# Allegro board 2019-09-0333.brd
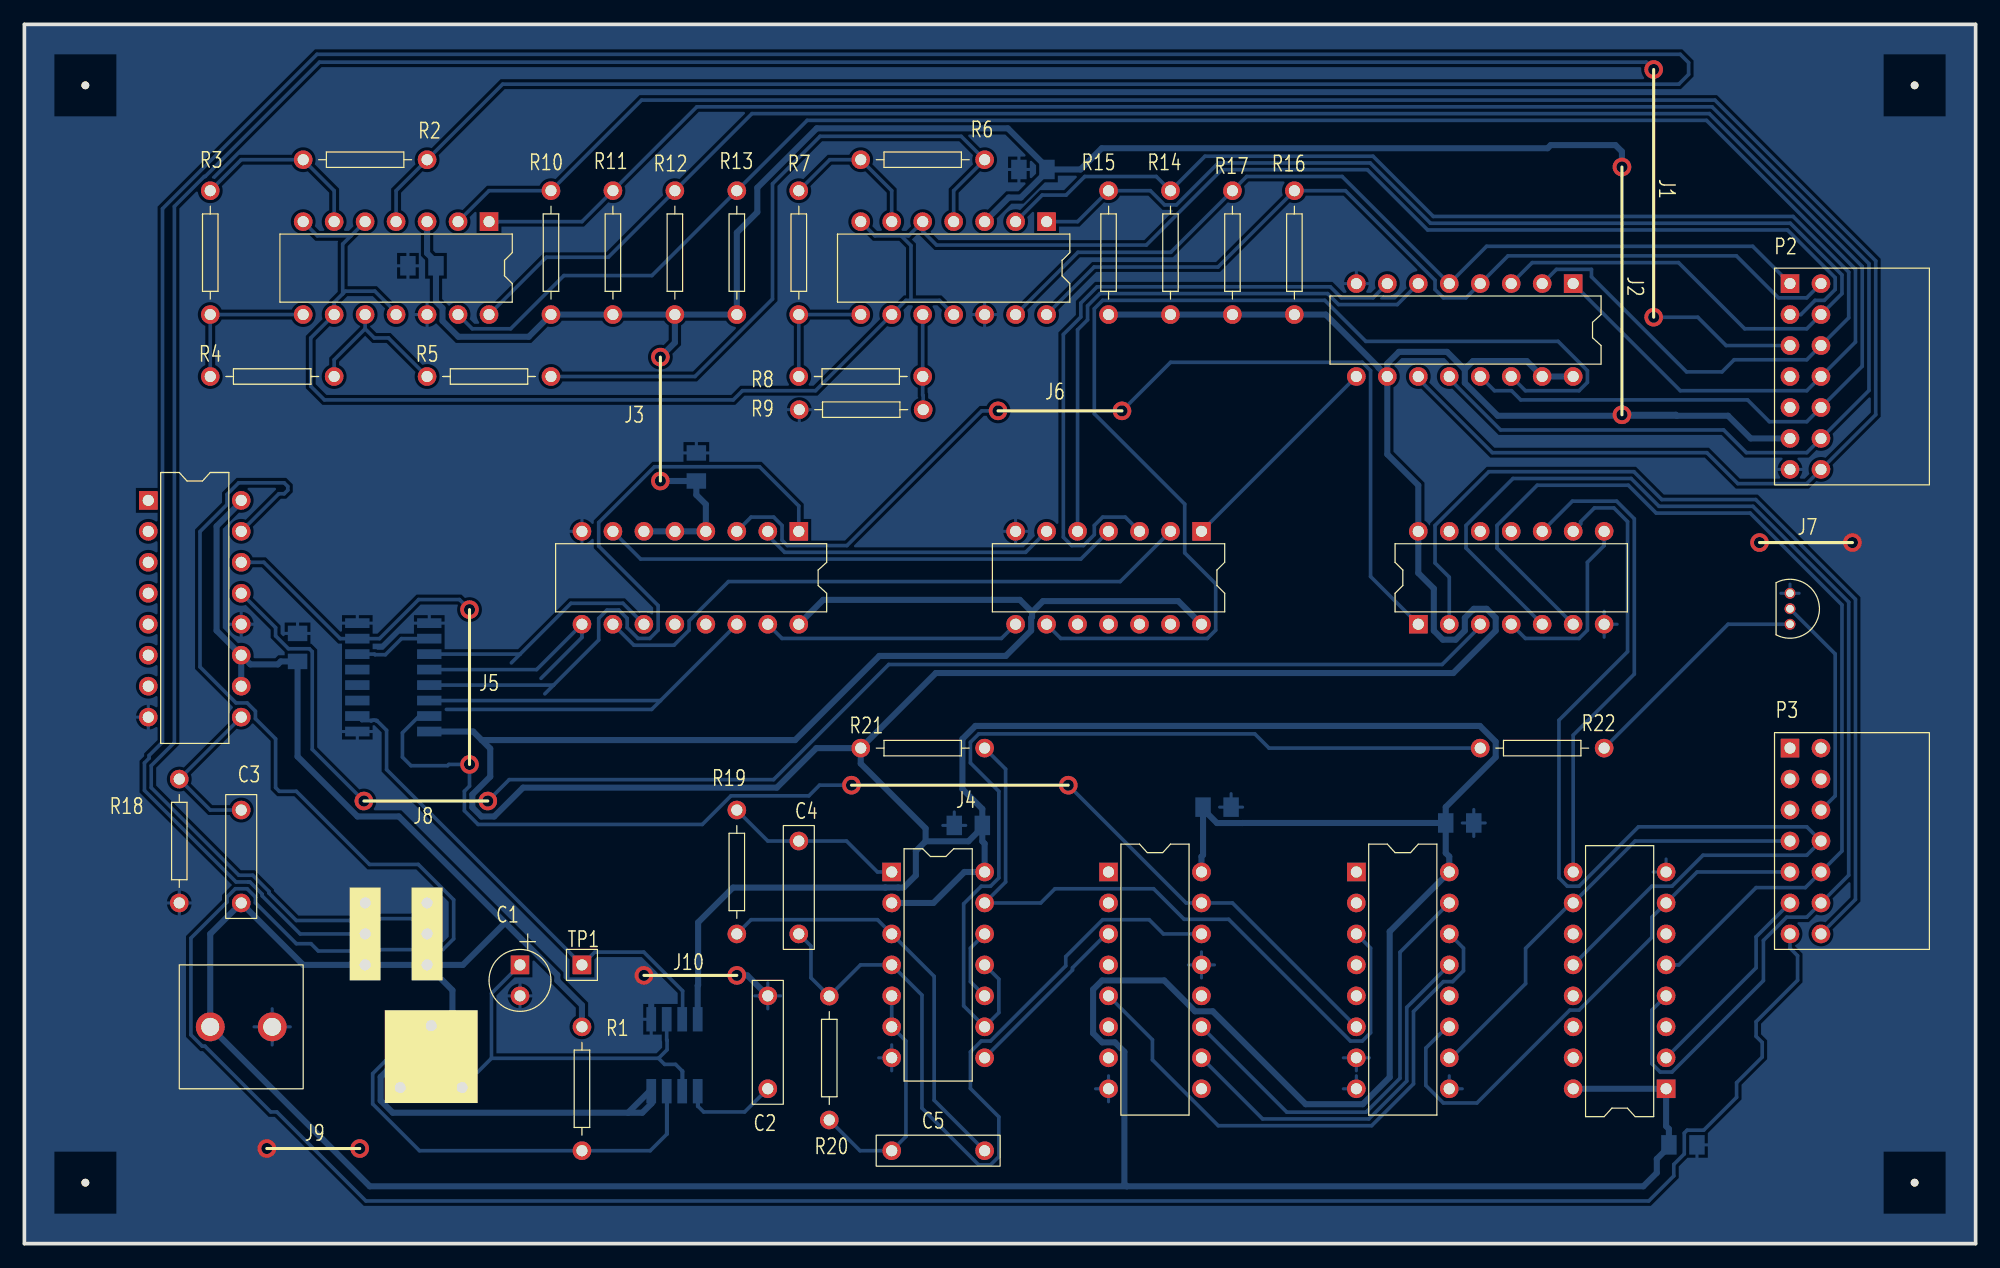
[diagram p0: board, top side]
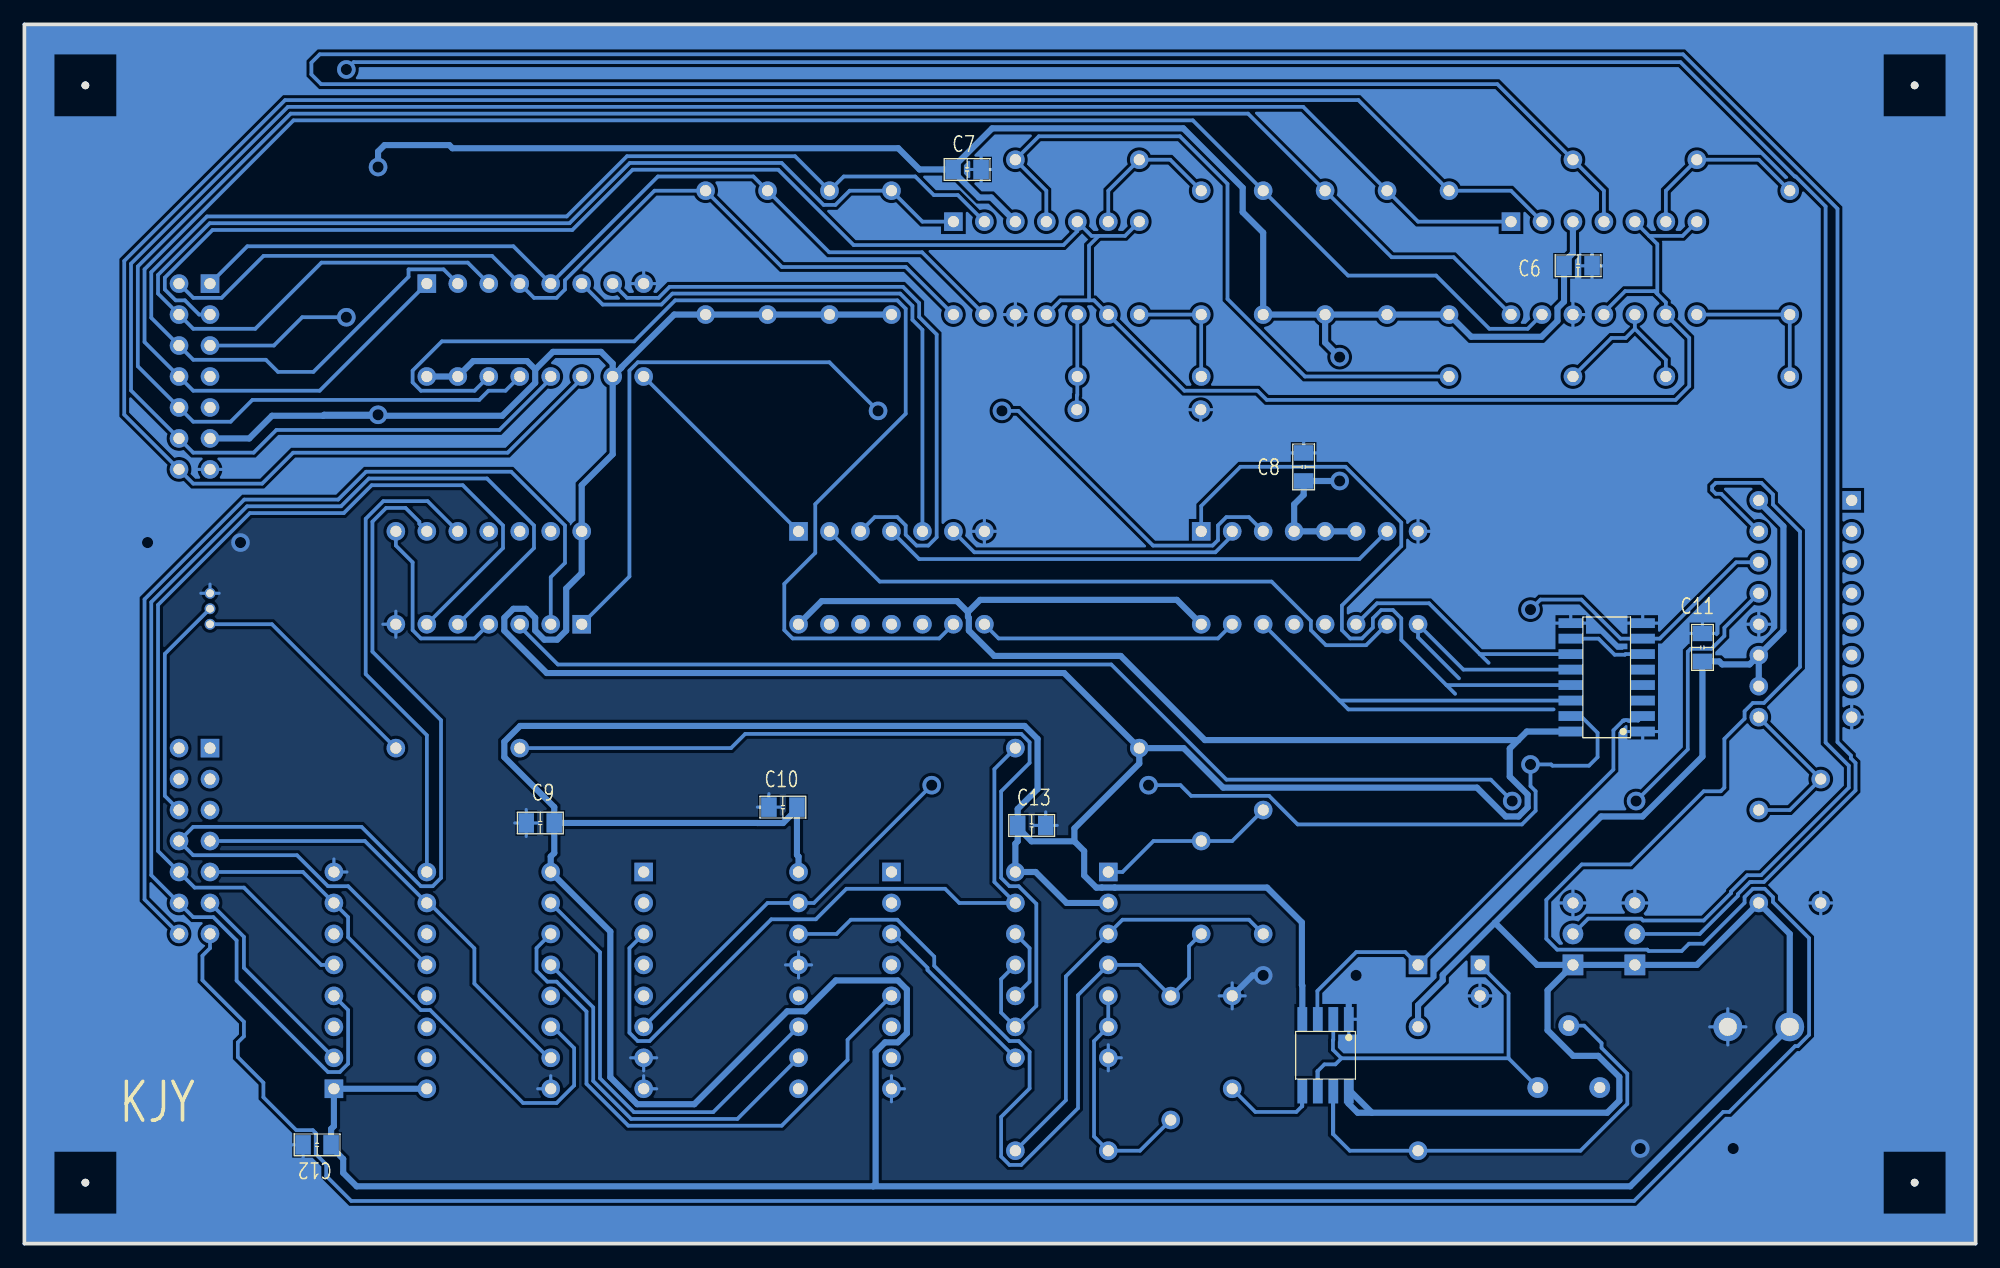
[diagram p1: board, bottom side, seen from below]

Outline 160 x 100 mm; copper layers: TOP, BOTTOM. Coordinates in mm from the lower left corner of the outline.
Outline path: 0,100 0,0 160,0 160,100 0,100

## Design rules (mm)
nets with their own width: min track width 0.5; nets +5V GND

## Placement (name value [footprint] x y rotation side)
C1  10uF  [CAP196]  40.64 22.86 180 top
C2  0.1uF  [CAP300]  60.96 12.7 90 top
C3  0.1uF  [CAP300]  17.78 27.94 90 top
C4  0.1uF  [CAP300]  63.5 33.02 270 top
C5  0.1uF  [CAP300]  78.74 7.62 180 top
C6  0.1uF  [SMDCAP]  33.6 80.2 180 bottom
C7  0.1uF  [SMDCAP]  83.7 88.1 180 bottom
C8  0.1uF  [SMDCAP]  55.1 62.7 90 bottom
C9  0.1uF  [SMDCAP]  116.7 34.5 0 bottom
C10  0.1uF  [SMDCAP]  96.8 35.8 0 bottom
C11  0.1uF  [SMDCAP]  22.4 47.9 90 bottom
C12  0.1uF  [SMDCAP]  135 8.1 0 bottom
C13  0.1uF  [SMDCAP]  78.4 34.3 180 bottom
J1  -  [7]  133.6 96.3 90 bottom
J2  -  [7]  131 88.3 90 bottom
J3  -  [33]  52.15 62.55 270 bottom
J4  -  [66]  85.6 37.6 0 bottom
J5  -  [44]  36.5 52 90 bottom
J6  -  [33]  90 68.3 0 bottom
J7  -  [22]  149.9 57.5 0 bottom
J8  -  [33]  38 36.3 0 bottom
J9  -  [22]  27.5 7.8 0 bottom
J10  -  [2]  50.8 22 180 bottom
NOREF  -  [unnamed]  155 95 0 top
NOREF#2  -  [unnamed]  5 5 0 top
NOREF#3  -  [unnamed]  5 95 0 top
NOREF#4  -  [unnamed]  155 5 0 top
P1  CON2  [POWER2]  15.24 17.78 0 top
P2  CON14  [JUMPER14]  144.78 78.74 270 top
P3  CON14  [JUMPER14]  144.78 40.64 270 top
Q1  2SC1815  [TO92]  144.78 53.34 0 top
R1  10K  [RES400]  45.72 17.78 270 top
R2  10K  [RES400]  33.02 88.9 180 top
R3  10K  [RES400]  15.24 86.36 270 top
R4  10K  [RES400]  15.24 71.12 0 top
R5  10K  [RES400]  33.02 71.12 0 top
R6  10K  [RES400]  78.74 88.9 180 top
R7  10K  [RES400]  63.5 86.36 270 top
R8  10K  [RES400]  63.5 71.12 0 top
R9  10K  [RES400]  73.7 68.4 180 top
R10  4.7K  [RES400]  43.18 76.2 90 top
R11  4.7K  [RES400]  48.26 76.2 90 top
R12  4.7K  [RES400]  53.34 76.2 90 top
R13  4.7K  [RES400]  58.42 76.2 90 top
R14  4.7K  [RES400]  93.98 76.2 90 top
R15  4.7K  [RES400]  88.9 76.2 90 top
R16  4.7K  [RES400]  104.14 76.2 90 top
R17  4.7K  [RES400]  99.06 76.2 90 top
R18  680K  [RES400]  12.7 38.1 270 top
R19  10K  [RES400]  58.42 35.56 270 top
R20  10K  [RES400]  66 20.3 270 top
R21  10K  [RES400]  68.58 40.64 0 top
R22  10K  [RES400]  129.54 40.64 180 top
TP1  TP  [JUMPER1]  45.72 22.86 0 top
U1  NE555  [SOP8]  51.4 18.4 270 bottom
U2  LM339  [DIP14_3]  38.1 83.82 270 top
U3  LM339  [DIP14_3]  83.82 83.82 270 top
U4  40147  [DIP16_3]  127 78.74 270 top
U5  4069  [DIP14_3]  96.52 58.42 270 top
U6  4518  [SOP16]  27.3 42 0 bottom
U7  4585  [DIP16_3]  63.5 58.42 270 top
U8  4027  [DIP16_3]  10.16 60.96 0 top
U9  4071  [DIP14_3]  114.3 50.8 90 top
U10  4001  [DIP14_3]  71.12 30.48 0 top
U11  4017  [DIP16_3]  88.9 30.48 0 top
U12  4051  [DIP16_3]  109.22 30.48 0 top
U13  4175  [DIP16_3]  134.62 12.7 180 top
VR1  1M  [RESADJ]  35.9 12.8 270 top
VR2  100K  [JUMPER3]  27.94 22.86 90 top
VR3  10K  [JUMPER3]  33.02 22.86 90 top

## Library data of the parts
C1 = Cap POL
C2-C5 = Cap NP
C6 = Cap TEXT_0
C7 = Cap TEXT_1
C8 = Cap TEXT_2
C9 = Cap TEXT_3
C10 = Cap TEXT_4
C11 = Cap TEXT_5
C12 = Cap TEXT_6
C13 = Cap TEXT_7
J1-J10 = JUMPER
P1 = CON2
P2 P3 = CON14
Q1 = 2SC1815
R1-R22 = resistor
TP1 = TP
U1 = NE555
U2 U3 = LM339: Tolerance: ***; User Part Number: ***
U4 = 40147: Tolerance: ***; User Part Number: ***
U5 = 4069: Tolerance: ***; User Part Number: ***
U6 = 4518
U7 = 4585: Tolerance: ***; User Part Number: ***
U8 = 4027: Tolerance: ***; User Part Number: ***
U9 = 4071: Tolerance: ***; User Part Number: ***
U10 = 4001: Tolerance: ***; User Part Number: ***
U11 = 4017: Tolerance: ***; User Part Number: ***
U12 = 4051: Tolerance: ***; User Part Number: ***
U13 = 4175: Tolerance: ***; User Part Number: ***
VR1 = VR1_0: Tolerance: ***; User Part Number: ***
VR2 VR3 = VR2: User Part Number: ***

## Footprints (pads in the part's own frame, mm; a bottom-side part is the same pattern mirrored in y, then rotated)
CAP196
  rect 1.524x1.524 hole 0.914: 1(0,0)
  round 1.524 hole 0.914: 2(0,2.54)
CAP300
  round 1.524 hole 0.914: 1(0,0) 2(7.62,0)
DIP14_3
  rect 1.524x1.524 hole 0.914: 1(0,0)
  round 1.524 hole 0.914: 2(0,-2.54) 3(0,-5.08) 4(0,-7.62) 5(0,-10.16) 6(0,-12.7) 7(0,-15.24) 8(7.62,-15.24) 9(7.62,-12.7) 10(7.62,-10.16) 11(7.62,-7.62) 12(7.62,-5.08) 13(7.62,-2.54) 14(7.62,0)
DIP16_3
  rect 1.524x1.524 hole 0.914: 1(0,0)
  round 1.524 hole 0.914: 2(0,-2.54) 3(0,-5.08) 4(0,-7.62) 5(0,-10.16) 6(0,-12.7) 7(0,-15.24) 8(0,-17.78) 9(7.62,-17.78) 10(7.62,-15.24) 11(7.62,-12.7) 12(7.62,-10.16) 13(7.62,-7.62) 14(7.62,-5.08) 15(7.62,-2.54) 16(7.62,0)
JUMPER1
  rect 1.524x1.524 hole 0.914: 1(0,0)
JUMPER3
  rect 1.7x1.7 hole 0.914: 1(0,0)
  round 1.7 hole 0.91: 2(2.54,0) 3(5.08,0)
JUMPER14
  rect 1.524x1.524 hole 0.914: 1(0,0)
  round 1.524 hole 0.914: 2(0,2.54) 3(2.54,0) 4(2.54,2.54) 5(5.08,0) 6(5.08,2.54) 7(7.62,0) 8(7.62,2.54) 9(10.16,0) 10(10.16,2.54) 11(12.7,0) 12(12.7,2.54) 13(15.24,0) 14(15.24,2.54)
POWER2
  round 2.362 hole 1.473: 1(0,0) 2(5.08,0)
RES400
  round 1.524 hole 0.914: 1(0,0) 2(10.16,0)
RESADJ
  round 1.7 hole 0.91: (0,-5.08) 1(0,0) 2(-5.08,-2.54)
SMDCAP
  rect 1.27x1.6 smd: 1(-0.15,0) 2(2.15,0)
SOP8
  rect 2x0.8 smd: 1(0,0) 2(0,-1.27) 3(0,-2.54) 4(0,-3.81) 5(5.9,-3.81) 6(5.9,-2.54) 7(5.9,-1.27) 8(5.9,0)
SOP16
  rect 2x0.8 smd: 1(0,0) 2(0,-1.27) 3(0,-2.54) 4(0,-3.81) 5(0,-5.08) 6(0,-6.35) 7(0,-7.62) 8(0,-8.89) 9(5.9,-8.89) 10(5.9,-7.62) 11(5.9,-6.35) 12(5.9,-5.08) 13(5.9,-3.81) 14(5.9,-2.54) 15(5.9,-1.27) 16(5.9,0)
TO92
  round 0.889 hole 0.635: 1(0,0) 2(0,-1.27) 3(0,-2.54)
unnamed
  round 0.635 hole 3 unplated: (0,0)

## Nets
+5V: C3.1 C6.1 C7.1 C8.1 C9.1 C10.1 C11.1 C12.1 C13.1 P1.1 P2.11 R1.1 R10.1 R11.1 R12.1 R13.1 R14.1 R15.1 R16.1 R17.1 R21.1 U1.4(RST) U1.8(VCC) U2.3 U3.3 U4.10(I\9\) U4.15(I\0\) U4.16(VCC) U5.14 U6.16 U7.4(A>BIN) U7.5(A<BIN) U7.6(A=BIN) U7.16(VCC) U8.10(J) U8.11(K) U8.16 U9.14 U10.2(I1) U10.14 U11.16(VCC) U12.16(VCC) U13.1(R\S\T\) U13.16(VCC) VR2.1(A) VR3.1(A)
GND: C1.2 C2.2 C6.2 C7.2 C8.2 C9.2 C10.2 C11.2 C12.2 C13.2 P1.2 P2.13 Q1.1(B) R9.2 R18.2 U1.1(GND) U2.12 U3.12 U4.8(GND) U5.7 U6.1(CLK) U6.8 U6.9(CLK) U7.8(GND) U8.8 U8.12(RST) U9.7 U10.7 U11.8(GND) U11.13(C\K\E\N\) U12.7(VEE) U12.8(GND) U12.9(C) U13.8(GND) VR2.3(WIPER) VR3.3(WIPER)
AD0: P2.14 R10.2 U2.2(OUT) U4.11(I\1\)
AD1: P2.12 R11.2 U2.1(OUT) U4.12(I\2\)
AD2: P2.10 R12.2 U2.14(OUT) U4.13(I\3\)
AD3: P2.8 R13.2 U2.13(OUT) U4.1(I\4\)
AD4: P2.6 R14.2 U3.2(OUT) U4.2(I\5\)
AD5: P2.4 R15.2 U3.1(OUT) U4.3(I\6\)
AD6: P2.2 R16.2 U3.14(OUT) U4.4(I\7\)
AD7: P2.1 R17.2 U3.13(OUT) U4.5(I\8\)
CLK: TP1.1 U1.3(OUT) U6.2(EN)
MOTOR-GND: P3.6 Q1.2(C)
MR: U6.7(CLR) U6.15(CLR) U8.14(Q\) U11.15(RST) U12.6(E\N\)
MR2: P3.13 U8.15(Q)
SW1: P3.14 U9.2(I1)
SW2: P3.12 U9.5(I0) U13.4(D0)
SW3: P3.10 U9.6(I1) U13.5(D1)
SW4: P3.8 U9.9(I1) U13.12(D2)
SWLED1: P3.11 U13.2(Q0)
SWLED2: P3.9 U12.11(A) U13.7(Q1)
SWLED3: P3.7 U12.10(B) U13.10(Q2)
VR3: P2.5 VR3.2(B)
VR-LED: P2.3 U2.5(+IN) U2.7(+IN) U2.9(+IN) U2.11(+IN) U3.5(+IN) U3.7(+IN) U3.9(+IN) U3.11(+IN)
N02154: R2.2 R3.1 U2.6(-IN)
N02158: R2.1 U2.4(-IN) VR2.2(B)
N02195: R3.2 R4.1 U2.8(-IN)
N02258: R4.2 R5.1 U2.10(-IN)
N02321: R5.2 R6.1 U3.4(-IN)
N02384: R6.2 R7.1 U3.6(-IN)
N02447: R7.2 R8.1 U3.8(-IN)
N02510: R8.2 R9.1 U3.10(-IN)
N03272: U4.9(A\) U5.1(I)
N03276: U4.7(B\) U5.3(I)
N03288: U4.6(C\) U5.5(I)
N03300: U4.14(D\) U5.9(I)
N03312: U5.8(O) U7.15(A3)
N03319: U5.6(O) U7.2(A2)
N03331: U5.4(O) U7.7(A1)
N03346: U5.2(O) U7.10(A0)
N03382: U6.11(Q0) U7.11(B0)
N03384: U6.12(Q1) U7.9(B1)
N03386: U6.13(Q2) U7.1(B2)
N03388: U6.14(Q3) U7.14(B3)
N03412: U6.6(Q3) U6.10(EN)
N05589: U7.3(A=BOUT) U9.1(I0)
N05720: R1.2 U1.7(DISC) VR1.2
N05724: C1.1 U1.2(TRIG) U1.6(THR) VR1.1
N05765: C2.1 U1.5(CV)
N05780: U8.13(CLK) U9.3(O)
N05813: C3.2 R18.1 U8.9(SET)
N09092: Q1.3(E) R22.1
N09137: C5.1 R19.2 U10.3(O)
N09147: C5.2 R20.2 U10.5(I0) U10.6(I1)
N09232: C4.1 R19.1 U10.1(I0)
N09296: C4.2 R20.1 U10.4(O) U11.14(CLK)
N09410: U10.8(I0) U11.3(0)
N09434: U11.11(9) U12.15(X2)
N09465: U11.5(6) U12.14(X1)
N09487: U11.10(4) U12.13(X0)
N09499: R21.2 U10.13(I1) U12.3(X)
N09532: U10.10(O) U10.12(I0)
N09550: R22.2 U10.9(I1) U10.11(O)
N09947: U9.4(O) U9.8(I0)
N09972: U9.10(O) U13.9(CLK)

Pads without a net: P2 7 9; P3 1 2 3 4 5; U5 10 11 12 13; U6 3 4 5; U7 12 13; U8 1 2 3 4 5 6 7; U9 11 12 13; U11 1 2 4 6 7 9 12; U12 1 2 4 5 12; U13 3 6 11 13 14 15

## Via types
v1: diameter 1.524, hole 0.914, TOP to BOTTOM, 20 vias

## Routing (per net, layer and track width the routed paths; a pad name or vN(x,y) marks a point on that pad's centre or on a via; arc(x,y) is an arc through that point)
+5V: length 938.1
  BOTTOM w0.5: C7.1 86.6,88.1 88.34,89.84 124.9,89.84 125.16,90.1 130.47,90.1 131,89.57 v1(131,88.3) ; C7.1 83.85,88.27 80.64,91.47 64.97,91.47 60.1,86.6 60.1,84.6 58.42,82.92 R13.1 R12.1 ; C7.1 83.85,87.94 81.72,85.8 80.72,85.8 U3.3 ; U4.10 111.76,72.19 112.71,73.14 116.66,73.14 118.09,71.71 118.11,71.71 ; U4.10 111.04,71.84 111.04,71.88 106.72,76.2 R16.1 R17.1 R14.1 R15.1 ; U4.10 111.76,64.74 114.3,62.2 U9.14 114.3,55 115.57,53.73 115.57,50.27 116.31,49.53 117.36,49.53 118.11,50.28 118.11,51.33 118.86,52.07 119.91,52.07 120.65,51.33 120.65,50.27 117.17,46.8 74.74,46.8 R21.1 ; 82.63,51.8 82.63,51.4 82.55,51.33 82.55,50.28 80.47,48.2 70.1,48.2 63.2,41.3 37.5,41.3 ; 82.63,51.8 83.53,52.7 94.62,52.7 U5.14 ; 82.63,51.8 81.63,52.8 65.5,52.8 U7.16 ; R21.1 68.58,39.37 73.9,34.05 73.9,33 ; R21.1 64.94,40.64 61.7,37.4 40.89,37.4 38.52,35.03 37.48,35.03 36.73,35.77 36.73,36.83 38.2,38.3 38.2,40.6 37.5,41.3 ; 51.44,12.76 51.44,11.5 50.67,10.73 49.5,10.73 ; R1.1 45.72,19.56 43.7,21.58 43.7,22.04 39.42,26.32 ; VR3.1 35.96,22.86 39.42,26.32 ; VR3.1 VR2.1 22.86,22.86 C3.1 15.24,25.4 P1.1 28.32,4.7 90.4,4.7 ; VR3.1 35.1,20.78 35.1,17.5 33,15.4 30.94,15.4 29.21,13.67 29.21,11.73 30.21,10.73 49.5,10.73 ; 118.11,71.71 118.79,72.39 123.19,72.39 U4.15 U4.16 ; 118.11,71.71 118.11,70.59 120.81,67.9 135.5,67.9 ; C9.1 99.9,34.5 99.9,34.5 97.79,34.5 96.65,35.63 ; C9.1 116.55,32.04 116.84,31.75 U12.16 111.95,25.59 111.95,13.64 109.75,11.43 105.07,11.43 97.44,19.05 96,19.05 93.46,21.59 88.38,21.59 87.63,20.84 87.63,17.25 88.38,16.51 89.42,16.51 90.2,15.73 90.2,4.9 90.4,4.7 ; C9.1 116.55,35.8 120.65,39.9 120.65,41.16 119.35,42.46 77.99,42.46 76.92,41.39 76.92,37.28 78.55,35.65 C13.1 78.55,34.13 ; 135.5,67.9 139.7,67.9 141.56,66.04 P2.11 ; 135.5,67.9 135.42,67.98 v1(131,67.98) ; 39.42,26.32 30.7,35.03 27.32,35.03 22.4,39.95 C11.1 21.02,47.75 20.78,47.51 18.53,47.51 U8.11 ; U10.2 74.54,27.94 77.08,30.48 U10.14 78.74,32.81 78.55,33 78.55,34.13 ; 90.4,4.7 132.75,4.7 133.86,5.8 133.86,6.94 134.85,7.93 C12.1 134.85,9.4 134.62,9.63 U13.1 U13.16 ; 73.9,33 73.9,33 77.41,33 78.55,34.13 ; 73.9,33 73.1,32.2 73.1,30.2 72.1,29.2 71.65,29.2 71.64,29.21 70.59,29.21 70.59,29.2 58.1,29.2 55.24,26.34 55.24,21.2 55.21,21.16 U1.4 ; C10.1 96.65,35.63 ; 96.65,35.63 96.65,31.88 96.52,31.75 U11.16 ; 49.5,10.73 51.27,12.5 U1.8 ; R12.1 R11.1 R10.1 41.36,74.38 35.59,74.38 34.29,75.68 34.29,76.72 33.75,77.26 C6.1 33.9,80.35 33.02,81.23 U2.3 ; R12.1 53.34,73.9 v1(52.15,72.71) ; U8.16 17.75,60.93 17.75,60.83 15.76,58.84 15.76,50.28 U8.11 ; 37.5,41.3 36.8,42 U6.16 ; U8.11 U8.10 ; v1(52.15,62.55) C8.1 55.1,61.41 55.88,60.63 U7.4 U7.5 U7.6
GND: length 129.4
  BOTTOM w0.254: U11.13 97.59,22.86 ; U11.13 95.45,22.86 ; U11.13 96.52,23.93 ; U11.13 96.52,21.79 ; U9.7 130.61,50.8 ; U9.7 129.54,49.73 ; U9.7 129.54,51.87 ; C8.2 55.1,65.79 ; C8.2 53.99,64.85 ; C8.2 56.21,64.85 ; 45.72,57.35 U7.8 ; U7.8 44.65,58.42 ; U7.8 45.72,59.49 ; U8.12 17.78,51.87 ; U8.12 18.85,50.8 ; U8.12 16.71,50.8 ; U8.12 17.78,49.73 ; 143.71,63.5 P2.13 145.85,63.5 ; 109.22,13.77 U12.8 108.15,12.7 ; 33.02,26.78 VR3.3 ; VR3.3 31.86,27.94 ; VR3.3 33.02,29.1 ; VR3.3 34.18,27.94 ; R9.2 64.61,68.4 ; R9.2 63.54,67.33 ; R9.2 62.47,68.4 ; VR2.3 27.94,29.1 ; VR2.3 29.1,27.94 ; VR2.3 26.78,27.94 ; Q1.1 145.53,53.34 ; Q1.1 144.03,53.34 ; Q1.1 144.78,54.09 ; C2.2 62.03,20.32 ; C2.2 60.96,19.25 ; C2.2 60.96,21.39 ; C2.2 59.89,20.32 ; U12.7 110.29,15.24 ; U12.7 109.22,14.17 ; U12.7 108.15,15.24 ; C10.2 98.95,36.91 ; C10.2 99.89,35.8 ; C10.2 98.01,35.8 ; U6.9 34.51,50.89 ; U6.9 31.89,50.89 ; U6.9 33.2,51.6 ; 39.57,20.32 C1.2 ; C1.2 40.64,21.39 ; C1.2 40.64,19.25 ; C1.2 41.71,20.32 ; 108.15,78.74 U4.8 ; U4.8 109.22,79.81 ; U4.8 110.29,78.74 ; C6.2 31.45,81.31 ; C6.2 32.39,80.2 ; C6.2 30.51,80.2 ; C6.2 31.45,79.09 ; 31.95,76.2 U2.12 ; U2.12 33.02,75.13 ; U2.12 33.02,77.27 ; R18.2 13.77,27.94 ; R18.2 11.63,27.94 ; R18.2 12.7,26.87 ; R18.2 12.7,29.01 ; 75.31,34.3 C13.2 ; C13.2 76.25,35.41 ; C13.2 77.19,34.3 ; P1.2 21.81,17.78 ; P1.2 18.83,17.78 ; P1.2 20.32,16.29 ; P1.2 20.32,19.27 ; 10.16,42.11 U8.8 ; U8.8 9.09,43.18 ; U8.8 10.16,44.25 ; U6.8 27.3,51.6 ; U6.8 28.61,50.89 ; U6.8 25.99,50.89 ; C9.2 118.85,35.61 ; C9.2 119.79,34.5 ; C9.2 118.85,33.39 ; C9.2 117.91,34.5 ; U6.1 28.61,42 ; U6.1 25.99,42 ; U6.1 27.3,41.29 ; U5.7 81.28,59.49 ; U5.7 81.28,57.35 ; U5.7 82.35,58.42 ; U5.7 80.21,58.42 ; 71.12,14.17 U10.7 ; U10.7 70.05,15.24 ; U10.7 71.12,16.31 ; 81.55,86.99 C7.2 ; C7.2 81.55,89.21 ; C7.2 82.49,88.1 ; C7.2 80.61,88.1 ; 77.67,76.2 U3.12 ; U3.12 79.81,76.2 ; U3.12 78.74,75.13 ; U3.12 78.74,77.27 ; 88.9,11.63 U11.8 ; U11.8 87.83,12.7 ; U11.8 88.9,13.77 ; C11.2 23.51,50.05 ; C11.2 21.29,50.05 ; C11.2 22.4,50.99 ; 50.69,18.4 U1.1 51.4,17.09 ; 138.09,8.1 C12.2 137.15,6.99 ; 116.84,13.77 U12.9 117.91,12.7 ; 134.62,31.55 U13.8 133.55,30.48
  BOTTOM w0.5: C2.2 59.28,22 v1(58.42,22) ; U1.1 51.4,21.4 v1(50.8,22)
  vias: v1(19.88,7.8) v1(27.5,7.8) v1(142.28,57.5) v1(149.9,57.5)
AD0: length 182.1
  BOTTOM w0.3: U2.2 38.1,86.36 R10.2 50.61,93.79 138.62,93.79 151.81,80.6 151.81,67.99 P2.14 146.15,62.33 140.5,62.33 137.96,64.87 120.37,64.87 114.3,70.94 U4.11
AD1: length 172
  BOTTOM w0.3: U2.1 45.72,83.82 R11.2 55.14,93.24 138.39,93.24 151.26,80.37 151.26,69.98 P2.12 146.15,64.87 141.2,64.87 139.34,66.73 121.05,66.73 116.84,70.94 U4.12
AD2: length 167.5
  BOTTOM w0.3: U2.14 42.8,80.9 47.88,80.9 R12.2 59.66,92.68 138.16,92.68 150.7,80.14 150.7,71.96 P2.10 146.15,67.41 143.09,67.41 141.3,69.2 122.7,69.2 121.95,69.95 120.55,69.95 U4.13
AD3: length 161.6
  BOTTOM w0.3: U2.13 36.73,75.03 39.87,75.03 44.24,79.4 51.46,79.4 R13.2 64.19,92.13 137.93,92.13 150.15,79.91 150.15,73.95 P2.8 146.15,69.95 135.79,69.95 U4.1
AD4: length 110.5
  BOTTOM w0.3: U3.2 83.46,86 85.42,86 86.95,87.53 92.81,87.53 R14.2 96.81,89.19 110.59,89.19 115.53,84.25 145.03,84.25 149.59,79.68 149.59,75.93 P2.6 146.15,72.49 140.2,72.49 139.21,71.5 136.3,71.5 128.5,79.3 128.5,79.91 125.63,79.91 U4.2
AD5: length 104.8
  BOTTOM w0.3: U4.3 123.64,80.46 135.64,80.46 141.07,75.03 146.15,75.03 P2.4 149.04,77.92 149.04,79.45 144.8,83.69 115.3,83.69 110.36,88.63 97.9,88.63 94.46,85.19 93.5,85.19 92.33,86.36 R15.2 86.36,83.82 U3.1
AD6: length 75.1
  BOTTOM w0.3: P2.2 146.15,77.57 143.83,77.57 140.39,81.01 121.65,81.01 U4.4 118.21,77.57 116.36,77.57 115.67,78.26 115.67,79.02 108.33,86.36 R16.2 97.88,80.1 87.72,80.1 U3.14
AD7: length 74.4
  BOTTOM w0.3: P2.1 141.72,81.8 119.9,81.8 U4.5 108.05,87.53 100.23,87.53 R17.2 94.01,81.31 86.39,81.31 U3.13
CLK: length 41.1
  BOTTOM w0.3: U6.2 27.67,42.9 28.41,42.9 28.45,42.88 28.51,42.91 28.61,42.93 28.71,42.93 28.8,42.91 28.87,42.89 28.89,42.9 28.9,42.9 28.91,42.9 29.7,42.1 29.7,38.88 TP1.1 46.77,23.91 50.79,23.91 53.98,20.73 53.98,18.43 U1.3
MOTOR-GND: length 18.5
  BOTTOM w0.3: Q1.2 148.49,48.36 148.49,36.73 P3.6
MR: length 102.9
  BOTTOM w0.3: v1(85.6,37.6) 95.26,27.94 U11.15 99.06,27.94 U12.6 ; U6.15 32.37,43.27 31,41.9 31,39.9 31.7,39.2 34.7,39.2 34.8,39.3 v1(36.5,39.3) 36.5,37.52 36.08,37.1 36.08,35.5 37.2,34.38 55.59,34.38 57.94,36.73 64.33,36.73 65.2,37.6 v1(67.82,37.6) ; v1(36.5,52) 35.67,52.83 32.33,52.83 29.12,49.62 U6.7 25.9,49.62 19.64,55.88 U8.14
MR2: length 248.5
  BOTTOM w0.3: U8.15 20.86,61.5 21.3,61.5 21.6,61.8 21.6,62.1 21.3,62.4 17.57,62.4 16.61,61.44 16.61,60.61 14.4,58.4 14.4,47.3 17.35,44.35 18.26,44.35 18.95,43.66 18.95,43.05 20.6,41.4 20.6,37.4 20.9,37.1 22.3,37.1 28.3,31.1 32.3,31.1 35.2,28.2 35.2,25 34.31,24.11 26.92,24.11 26.81,24 24.1,24 23.5,24.6 22.3,24.6 18.95,27.95 18.95,28.42 18.26,29.11 17.3,29.11 16.61,28.42 16.61,28.01 13.65,25.05 13.65,17.12 14.58,16.2 14.8,16.2 20.2,10.8 20.7,10.8 28,3.5 133.2,3.5 135.25,5.55 135.25,6.49 136.11,7.35 136.11,9.07 136.35,9.3 137.7,9.3 140.4,12 140.4,13.2 142.5,15.3 142.5,16.5 142,17 142,18.2 145.4,21.6 145.4,23.61 144.78,24.23 P3.13
SW1: length 77.8
  BOTTOM w0.3: U9.2 116.84,54.66 115.67,55.83 115.67,58.9 120.08,63.31 131.98,63.31 134.27,61.03 141.97,61.03 150.15,52.85 150.15,28.23 P3.14
SW2: length 101.4
  BOTTOM w0.3: U9.5 118.21,57.05 118.21,58.9 122.07,62.76 131.75,62.76 134.04,60.47 141.74,60.47 149.59,52.62 149.59,30.21 P3.12 146.15,26.77 144.5,26.77 142.6,24.87 142.6,21.57 135.1,14.07 134.14,14.07 133.45,14.76 133.45,19.15 U13.4
SW3: length 82.9
  BOTTOM w0.3: U13.5 135.66,22.86 142,29.2 146.04,29.2 P3.10 149.04,32.2 149.04,52.39 141.51,59.92 133.81,59.92 131.52,62.2 124.05,62.2 120.75,58.9 120.75,57.05 U9.6
SW4: length 86.2
  BOTTOM w0.3: U9.9 127.61,59.03 127.61,59.21 128.74,60.34 130.34,60.34 131.46,59.22 131.46,48.55 125.83,42.93 125.83,30 126.52,29.31 127.48,29.31 132.35,34.19 146.15,34.19 P3.8 146.15,31.85 137.64,31.85 135.1,29.31 133.45,29.31 U13.12
SWLED1: length 16.9
  BOTTOM w0.3: U13.2 142,22.62 142,25.16 P3.11
SWLED2: length 45
  BOTTOM w0.3: U12.11 116.66,17.78 114.92,16.04 114.92,12.97 116.36,11.53 119.11,11.53 126.72,19.15 127.48,19.15 133.45,25.12 133.45,26.77 U13.7 137.16,30.48 P3.9
SWLED3: length 37
  BOTTOM w0.3: U12.10 117.02,15.24 123.1,21.32 123.1,24.22 126.82,27.94 U13.10 132.08,33.02 P3.7
VR3: length 214.8
  BOTTOM w0.3: P2.5 139.54,73.66 137.22,75.98 v1(133.6,75.98) ; VR3.2 31.77,26.65 27.42,26.65 27.27,26.5 22.3,26.5 20.05,28.75 20.05,28.88 18.72,30.21 17.59,30.21 10.4,37.4 10.4,39.2 12.3,41.1 12.3,85.07 14.76,87.53 14.83,87.53 24.2,96.9 133,96.9 v1(133.6,96.3)
VR-LED: length 181.7
  BOTTOM w0.3: P2.3 145.67,76.2 146.84,77.37 147.59,77.37 148.49,78.26 148.49,79.22 144.57,83.14 115.07,83.14 110.13,88.08 98.18,88.08 92,81.9 74.8,81.9 73.66,83.04 U3.5 72.49,82.65 71.9,82.65 ; 26.77,82.65 26.1,81.98 26.1,77.9 ; 26.77,82.65 24.03,82.65 U2.7 ; 26.77,82.65 U2.5 ; 71.9,82.65 69.75,82.65 U3.7 ; 71.9,82.65 72.7,81.85 72.7,77.37 ; 72.7,77.37 75.03,77.37 U3.11 ; 72.7,77.37 72.29,77.37 U3.9 64.87,69.95 58.88,69.95 58.13,69.2 24.6,69.2 23.48,70.32 23.48,74.28 U2.9 25.4,77.2 26.1,77.9 ; 26.1,77.9 26.32,78.12 28.74,78.12 30.48,76.38 U2.11
N02154: length 14.8
  BOTTOM w0.3: R3.1 17.78,88.9 R2.2 25.4,86.36 U2.6
N02158: length 315.5
  BOTTOM w0.3: VR2.2 22.62,25.4 19.5,28.52 19.5,28.65 18.5,29.66 18.36,29.66 17.36,29.66 9.85,37.17 9.85,39.43 10.23,39.81 10.23,40.03 11.33,41.13 11.33,84.88 23.99,97.55 135.78,97.55 136.47,96.86 136.47,95.9 135.67,95.1 39.22,95.1 R2.1 30.48,86.36 U2.4
N02195: length 12.7
  BOTTOM w0.3: U2.8 R3.2 R4.1
N02258: length 12.8
  BOTTOM w0.3: 27.94,75.03 25.4,72.49 R4.2 ; 27.94,75.03 U2.10 ; 27.94,75.03 28.69,74.28 29.86,74.28 R5.1
N02321: length 56.2
  BOTTOM w0.3: U3.4 76.2,86.36 R6.1 76.82,90.82 65.24,90.82 61.34,86.92 61.34,77.48 54.99,71.12 R5.2
N02384: length 12.3
  BOTTOM w0.3: U3.6 71.12,86.36 R6.2 66.04,88.9 R7.1
N02447: length 10.2
  BOTTOM w0.3: U3.8 R7.2 R8.1
N02510: length 7.8
  BOTTOM w0.3: U3.10 R8.2 73.66,69.61 73.7,69.57 R9.1
N03272: length 18
  BOTTOM w0.3: U4.9 U5.1
N03276: length 54.8
  BOTTOM w0.3: U4.7 110.59,77.57 107.99,77.57 107.09,78.47 87.96,78.47 86.63,77.14 86.63,76 85.19,74.57 85.19,57.94 85.88,57.25 86.84,57.25 87.73,58.15 87.73,58.9 88.42,59.59 90.27,59.59 U5.3
N03288: length 47.5
  BOTTOM w0.3: U4.6 112.58,77.02 107.76,77.02 106.86,77.92 88.19,77.92 87.18,76.91 87.18,75.77 86.36,74.95 U5.5
N03300: length 96.2
  BOTTOM w0.3: U5.9 84.99,49.63 97,49.63 97.69,50.32 97.69,54.11 95.15,56.65 95.15,60.65 87.73,68.07 87.73,76.68 88.42,77.37 106.63,77.37 110,74 125.77,74 128.17,71.6 128.17,70.64 127.48,69.95 123.09,69.95 U4.14
N03312: length 21.3
  BOTTOM w0.3: U5.8 80.11,49.63 62.13,49.63 U7.15
N03319: length 24.5
  BOTTOM w0.3: U5.6 82.1,56.7 62.34,56.7 60.96,58.08 U7.2
N03331: length 42.5
  BOTTOM w0.3: U7.7 50.53,56.15 86.63,56.15 U5.4
N03346: length 50.7
  BOTTOM w0.3: U7.10 49.98,49.08 53.27,49.08 54.51,50.32 54.51,51.08 57.73,54.3 89.86,54.3 U5.2
N03382: length 21.1
  BOTTOM w0.3: U7.11 49.08,52.52 44.82,52.52 40.65,48.35 ; U6.11 40.65,48.35 ; 40.65,48.35 39.93,47.63
N03384: length 19.9
  BOTTOM w0.3: 42.36,46.36 45.72,49.72 U7.9 42,47.08 U6.12
N03386: length 57.6
  BOTTOM w0.3: U6.13 43.39,45.81 ; 43.39,45.81 47.09,49.51 47.09,51.28 47.78,51.97 48.74,51.97 49.43,51.28 49.43,50.52 50.32,49.63 51.28,49.63 51.97,50.32 51.97,52.33 47.09,57.21 47.09,59.14 51.67,63.72 60.28,63.72 63.5,60.5 U7.1 ; 43.39,45.81 42.68,45.09
N03388: length 45.7
  BOTTOM w0.3: 34.6,43.81 51.44,43.81 52.16,44.54 ; 52.16,44.54 U7.14 ; 52.16,44.54 U6.14
N03412: length 6.5
  BOTTOM w0.3: U6.6 28.7,48.35 28.75,48.3 29.6,48.3 30.92,49.62 U6.10
N05589: length 72.9
  BOTTOM w0.3: v1(79.84,68.3) 78.5,68.3 67.45,57.25 62.57,57.25 62.13,57.7 62.13,58.9 61.44,59.59 59.59,59.59 U7.3 ; U9.1 110.39,54.71 110.39,71.6 109.7,72.29 93.99,72.29 v1(90,68.3)
N05720: length 42.7
  BOTTOM w0.3: 52.67,8.97 52.7,9.01 52.7,12.76 ; 52.67,8.97 51.32,7.62 R1.2 32.4,7.62 28.56,11.46 28.56,13.94 30.67,16.05 30.67,16.45 32.11,17.88 VR1.2 ; 52.67,8.97 U1.7
N05724: length 34.7
  BOTTOM w0.3: 38.3,15.2 52,15.2 ; 38.3,15.2 38.3,20.52 C1.1 ; 38.3,15.2 VR1.1 ; 52,15.2 52.5,14.7 53.4,14.7 53.94,14.16 ; 52,15.2 52.7,15.9 52.7,16.67 52.7,16.68 52.67,16.71 U1.2 ; 53.94,14.16 53.98,14.12 53.98,12.76 ; 53.94,14.16 U1.6
N05765: length 9.5
  BOTTOM w0.3: U1.5 55.21,11.29 55.24,11.26 ; 55.24,11.26 55.7,10.8 59.06,10.8 C2.1 ; 55.24,11.26 55.24,12.76
N05780: length 109.7
  BOTTOM w0.3: v1(27.84,36.3) 23.6,40.54 23.6,48.55 23.37,48.79 21.65,48.79 20.6,49.84 20.6,50.52 U8.13 ; v1(38,36.3) 39.75,38.05 61.43,38.05 70.88,47.5 116.26,47.5 119.38,50.62 U9.3
N05813: length 13.3
  BOTTOM w0.3: U8.9 R18.1 15.24,35.56 C3.2
N09092: length 19.4
  BOTTOM w0.3: R22.1 139.7,50.8 Q1.3
N09137: length 34.6
  BOTTOM w0.3: C5.1 74.6,11.76 74.6,21.92 U10.3 69.95,26.57 59.59,26.57 R19.2
N09147: length 19.8
  BOTTOM w0.3: U10.5 U10.6 72.29,16.61 72.29,8.79 C5.2 68.52,7.62 R20.2
N09232: length 14.8
  BOTTOM w0.3: U10.1 69.95,30.48 67.41,33.02 C4.1 60.96,33.02 R19.1
N09296: length 67.5
  BOTTOM w0.3: U11.14 93.4,25.4 92.23,26.57 88.42,26.57 85.39,23.54 85.39,22.78 79.22,16.61 78.47,16.61 77.57,15.72 77.57,12.73 79.91,10.39 79.91,7.14 79.22,6.45 78.26,6.45 73.6,11.11 73.6,20.38 U10.4 68.56,22.86 R20.1 64.5,21.8 64.5,24.4 C4.2
N09410: length 14.5
  BOTTOM w0.3: U10.8 85.94,22.45 85.94,22.62 88.72,25.4 U11.3
N09434: length 36.4
  BOTTOM w0.3: U11.11 103.52,10.78 110.02,10.78 112.8,13.56 112.8,23.9 U12.15
N09465: length 46.7
  BOTTOM w0.3: U11.5 92.5,16.72 92.5,15.07 97.9,9.67 110.48,9.67 113.91,13.1 113.91,19.04 116.36,21.49 117.11,21.49 118.01,22.38 118.01,24.23 U12.14
N09487: length 31.2
  BOTTOM w0.3: U12.13 113.35,19.37 113.35,13.33 110.25,10.23 101.53,10.23 U11.10
N09499: length 60.3
  BOTTOM w0.3: U12.3 110.39,24.23 110.39,17.3 109.7,16.61 108.74,16.61 98.75,26.6 95.1,26.6 92.59,29.11 84.51,29.11 83.34,27.94 U10.13 80.46,29.66 80.46,38.92 R21.2
N09532: length 6
  BOTTOM w0.3: U10.12 77.57,24.23 77.57,21.49 U10.10
N09550: length 75.3
  BOTTOM w0.3: U10.11 79.91,21.69 79.91,18.95 U10.9 77.02,19.5 77.02,27.87 78.47,29.31 79.22,29.31 79.91,30 79.91,37.09 77.57,39.43 77.57,41.12 78.26,41.81 100.89,41.81 102.06,40.64 R22.2
N09947: length 15.7
  BOTTOM w0.3: U9.8 129.54,57.25 128.17,55.88 128.17,50.32 127.48,49.63 123.09,49.63 U9.4
N09972: length 40.2
  BOTTOM w0.3: U9.10 126.93,60.89 130.57,60.89 132.01,59.45 132.01,46.71 127,41.7 U13.9

## Copper pours and planes (outline as drawn; the poured copper is in the pictures)
GND on BOTTOM (solid shape): 151.23,69.38 151.34,69.4 151.4,69.3 151.4,68.16 147.69,64.45 146.61,64.23 146.36,63.16 146.37,63.13 145.99,62.74 145.69,62.74 145.6,62.8 145.6,62.9 145.79,63.63 145.43,64.29 145.39,64.4 145.49,64.47 146.32,64.47 146.95,65.09 148.04,65.32 148.27,66.41
GND on BOTTOM (solid shape): outline of 2554 points within 10.81,15.61 114.23,88.49
GND on BOTTOM (solid shape): outline of 2979 points within 0,0 160,100
(no net) on BOTTOM: 0,0 0,100 160,100 160,0 ; 101 cut-outs

Small or netless copper shapes (teardrops, artwork), in the pictures only: 1 on BOTTOM

## Text on the board
Ref Des/Silkscreen Bottom: KJY
COMPVAL_TYPE_TOP: FIGURE | SIZE | 0.635 | 0.91 | 0.914 | 1.473 | 3.0 | DRILL CHART: TOP to BOTTOM | ALL UNITS ARE IN MILLIMETERS | PLATED | NON-PLATED | QTY | 3 | 7 | 269 | 2 | 4
